# Altium PCB SOIC-16_L9.9-W3.9-P1.27-LS6.0-BL_2025-02-05.pcbdoc
Units mm, origin at the board's own origin, x right, y up, seen from the top; angles counter-clockwise.
Board outline 39.92 x 33.1 mm, 2 copper layers (Top Layer, Bottom Layer); 1 components, 0 nets, 16 pads, 0 vias.
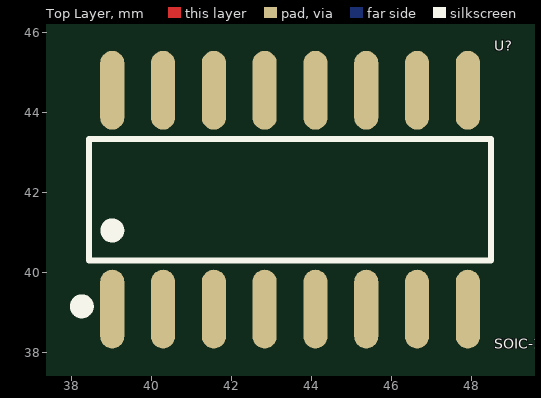
[diagram p0: Top Layer view]
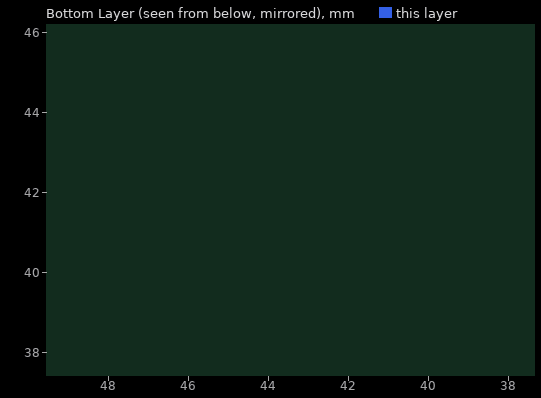
[diagram p1: Bottom Layer view, seen from below]

## Layer stack, top to bottom
Top Layer: signal copper (thickness not stored)
Dielectric: dielectric 0.32, FR-4, Dk 4.8
Bottom Layer: signal copper (thickness not stored)

## Board outline
65.324,25.4 25.4,25.4 25.4,58.496 65.324,58.496

## Components (designator, comment, footprint, x,y, rotation, side; value= is the part's Value field where it differs from the comment)
U? "SOIC-16_L9.9-W3.9-P1.27-LS6.0-BL" SOIC-16_L9.9-W3.9-P1.27-LS6.0-BL 43.33,41.821 r0 top

## Footprints (in the part's own frame and the unit in brackets; to place one, negate y for a bottom-side part, rotate by r counter-clockwise, add the part's x,y. Pads: shape width x height; smd on the part's side, far side on the other; paste and mask are expansions set on the pad)
SOIC-16_L9.9-W3.9-P1.27-LS6.0-BL [mm]
  oval 0.602x1.971 smd paste+0 mask+0.051: 1(-4.318,-2.736) 2(-3.048,-2.736) 3(-1.778,-2.736) 4(-0.508,-2.736) 5(0.762,-2.736) 6(2.032,-2.736) 7(3.302,-2.736) 8(4.572,-2.736) 9(4.572,2.736) 10(3.302,2.736) 11(2.032,2.736) 12(0.762,2.736) 13(-0.508,2.736) 14(-1.778,2.736) 15(-3.048,2.736) 16(-4.318,2.736)
  silkscreen extent -5.23,-2.82 5.15,1.52

## Nets (pads, with @x,y where several pads share a name; then routed paths per layer and width w, separated by ;. In a path a pad name is that pad's centre, name@x,y a point inside that pad or via, vN(x,y) a via of type N, cw(c..) or ccw(c..) an arc to the next point about the centre after c; other vN are vias at no path point)
pads on no net: U?.1 U?.2 U?.3 U?.4 U?.5 U?.6 U?.7 U?.8 U?.9 U?.10 U?.11 U?.12 U?.13 U?.14 U?.15 U?.16